# EAGLE board ir_hid (EAGLE 6.5.0)
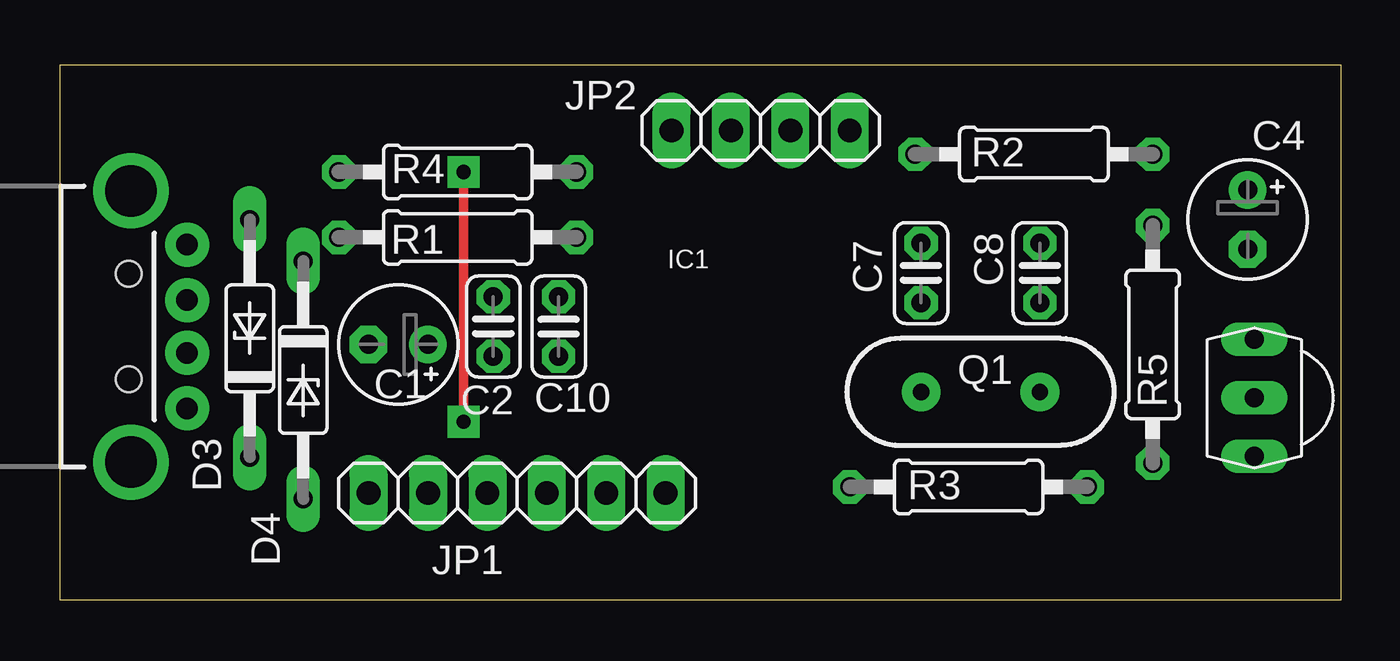
[diagram p0: board, top side]
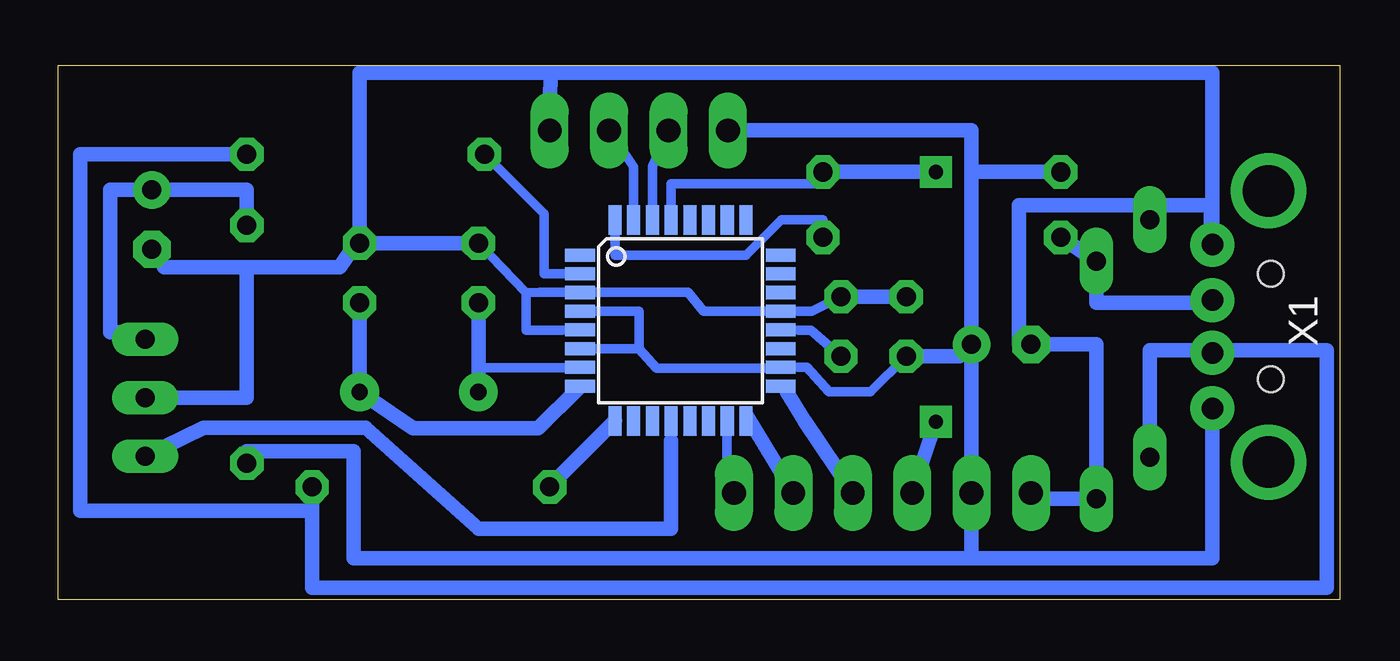
[diagram p1: board, bottom side, seen from below]

Size 54.79 x 22.85 mm. Coordinates in mm from the lower left corner, seen from the top.
Outline: 0,0 54.79,0 54.79,22.85 0,22.85 0,0
Copper layers (1*16): Top 0.035mm / dielectric 1.5mm / Bottom 0.035mm
Design rules "default *": minimum track width 10mil, minimum drill 24mil, track to track 8mil, track to pad 8mil, pad to pad 8mil, via to via 8mil, smd to smd 8mil, copper to edge 40mil, drill to drill 8mil, minimum pad ring 12mil, minimum via ring 15mil, stop-mask expansion 4mil, vias tented up to drill 0mil, thermal gap 10mil

## Footprints (pad centres in the part's own frame; a part is rotated, then mirrored left to right if it is on the bottom)
E2,5-5 = drill 0.813 pad 1.6: + -1.27,0 | drill 0.813 pad 1.6 octagon: - 1.27,0
C025-024X044 = drill 0.813 octagon: 1 -1.27,0; 2 1.27,0
DO35Z10 = drill 0.813 long: A 5.08,0; C -5.08,0
TQFP32-08 = smd 1.27 x 0.559: 1 -4.293,2.8; 2 -4.293,2; 3 -4.293,1.2; 4 -4.293,0.4; 5 -4.293,-0.4; 6 -4.293,-1.2; 7 -4.293,-2; 8 -4.293,-2.8; 17 4.293,-2.8; 18 4.293,-2; 19 4.293,-1.2; 20 4.293,-0.4; 21 4.293,0.4; 22 4.293,1.2; 23 4.293,2; 24 4.293,2.8 | smd 0.559 x 1.27: 9 -2.8,-4.293; 10 -2,-4.293; 11 -1.2,-4.293; 12 -0.4,-4.293; 13 0.4,-4.293; 14 1.2,-4.293; 15 2,-4.293; 16 2.8,-4.293; 25 2.8,4.293; 26 2,4.293; 27 1.2,4.293; 28 0.4,4.293; 29 -0.4,4.293; 30 -1.2,4.293; 31 -2,4.293; 32 -2.8,4.293
1X06 = drill 1.016 long: 1 -6.35,0; 2 -3.81,0; 3 -1.27,0; 4 1.27,0; 5 3.81,0; 6 6.35,0
1X04 = drill 1.016 long: 1 -3.81,0; 2 -1.27,0; 3 1.27,0; 4 3.81,0
HC49US = drill 0.7 pad 1.651: 1 -2.54,0; 2 2.54,0
0207/10 = drill 0.813 octagon: 1 -5.08,0; 2 5.08,0
TSOP18XX = drill 0.813 long: GND -0.001,-0.027; OUT -2.501,-0.027; VCC 2.499,-0.027
USB-A-H = drill 0.914 pad 1.88: D+ 2.4,1.127; D- 2.4,-1.127; GND 2.4,3.5; VBUS 2.4,-3.5 | drill 2.2: GND2 0,-5.8; GND3 0,5.8 | hole 1.1: -0.1,2.25; -0.1,-2.25

## Placement (x,y rotation side)
C1  4u7/16V  [E2,5-5]  14.48,10.92 180 top
C2  100nF  [C025-024X044]  18.54,11.68 90 top
C4  4u7/16V  [E2,5-5]  50.8,16.26 270 top
C7  22pF  [C025-024X044]  36.83,13.97 90 top
C8  22pF  [C025-024X044]  41.91,13.97 90 top
C10  100nF  [C025-024X044]  21.34,11.68 270 top
D3  ZPD-3V6  [DO35Z10]  8.13,11.18 90 top
D4  ZPD-3V6  [DO35Z10]  10.41,9.4 270 top
IC1  MEGA8-16AU(8AU)  [TQFP32-08]  28.19,11.94 0 bottom
JP1  ISP  [1X06]  19.56,4.57 180 top
JP2  UART  [1X04]  29.97,20.07 0 top
Q1  12MHz  [HC49US]  39.37,8.89 0 top
R1  68  [0207/10]  17.02,15.49 180 top
R2  68  [0207/10]  41.66,19.05 0 top
R3  2K2  [0207/10]  38.86,4.83 0 top
R4  10K  [0207/10]  17.02,18.29 0 top
R5  100  [0207/10]  46.74,10.92 90 top
U$1  TSOP4838  [TSOP18XX]  51.05,8.64 90 top
X1  USBA-LP  [USB-A-H]  3.05,11.68 0 top

## Library data of the parts
C1 C2 C4 C7 C8 C10 R1-R5 = resistor
D3 D4 = diode
IC1 = atmel; MPN: ATMEGA8-16AU; OC_FARNELL: 9171371; OC_NEWARK: 73M8863
JP1 JP2 = pinhead
Q1 X1 = SparkFun
U$1 = tsop-1

## Nets
5V: C1.+ C2.1 IC1.4 IC1.6 IC1.18 JP1.5 JP2.1 R4.1 R5.1 X1.VBUS
GND: C1.- C2.2 C4.- C7.2 C8.2 C10.1 D3.A D4.A IC1.3 IC1.5 IC1.21 JP1.6 JP2.4 U$1.GND X1.GND
N$1: IC1.32 R1.1
N$2: IC1.9 R3.1
N$3: IC1.2 R2.1
N$4: D4.C R1.2 X1.D+
N$5: C10.2 IC1.20
N$6: D3.C R2.2 R3.2 X1.D-
N$7: C7.1 IC1.7 Q1.1
N$8: C8.1 IC1.8 Q1.2
N$9: IC1.29 JP1.4 R4.2
N$10: C4.+ R5.2 U$1.VCC
N$11: IC1.30 JP2.2
N$12: IC1.15 JP1.1
N$13: JP1.2
N$14: JP1.3
N$15: IC1.31 JP2.3
N$16: IC1.12 U$1.OUT

## Tracks (layer width: path | path; a pad name or v marks a point on that pad's centre or on a via)
5V
  Bottom 0.406: C2.1 20.07,8.89 21.84,8.89 22.79,9.94 IC1.18 23.9,9.91 29.21,9.91 29.97,10.74 | IC1.4 29.97,12.34 29.97,10.74 | 29.97,10.74 IC1.6
  Bottom 0.61: C1.+ JP1.5 15.75,1.78 | C1.+ 16.26,10.41 C2.1 | X1.VBUS 5.45,1.78 15.75,1.78 | 15.75,1.78 42.16,1.78 42.16,6.35 46.74,6.35 R5.1 | C1.+ 15.75,18.29 | R4.1 15.75,18.29 | JP2.1 15.75,20.07 15.75,18.29
GND
  Bottom 0.406: C10.1 22.58,12.34 23.13,12.34 IC1.21 24.04,12.34 27.2,12.34 27.87,13.14 IC1.3 | IC1.3 32.49,13.21 | IC1.5 33.26,11.53 34.8,11.53 34.8,13.13 | 34.8,13.13 34.22,13.14 IC1.3 | C7.2 34.8,13.13 | C8.2 42.06,15.24 | X1.GND 5.61,15.18 5.61,16.87
  Bottom 0.61: X1.GND 5.45,22.53 33.76,22.53 | C2.2 C10.1 | C7.2 C8.2 41.91,22.53 33.76,22.53 | 42.06,15.24 42.77,14.22 46.74,14.22 | 46.74,14.22 50.27,14.22 C4.- | U$1.GND 50.57,8.64 46.74,8.64 46.74,14.22 | D3.A 8.13,16.87 | JP1.6 12.95,4.32 D4.A 10.41,10.92 C1.- 13.72,10.92 13.72,16.87 8.13,16.87 | JP2.4 33.76,22.53 | 5.61,16.87 8.13,16.87
N$1
  Bottom 0.406: IC1.32 30.99,14.73 25.4,14.73 23.88,16.26 22.1,16.26 R1.1
N$2
  Bottom 0.61: R3.1 33.78,4.86 IC1.9
N$3
  Bottom 0.406: IC1.2 32.52,13.95 34.04,13.95 34.04,16.51 R2.1
N$4
  Bottom 0.406: X1.D+ 5.84,12.7
  Bottom 0.61: 5.84,12.7 10.41,12.7 D4.C R1.2
N$5
  Bottom 0.406: IC1.20 23.16,11.53 22.61,11.53 C10.2
N$6
  Bottom 0.406: 8.13,10.67 8.13,10.56 X1.D-
  Bottom 0.61: R2.2 53.85,19.05 53.85,3.81 43.94,3.81 | R3.2 43.94,3.81 | 43.94,3.81 43.94,0.51 0.56,0.51 0.56,10.67 8.13,10.67 | 8.13,10.56 D3.C
N$7
  Bottom 0.406: IC1.7 32.52,9.93 36.83,9.93
  Bottom 0.61: C7.1 36.83,9.93 Q1.1
N$8
  Bottom 0.406: 32.54,9.04 IC1.8
  Bottom 0.61: C8.1 Q1.2 39.62,7.34 34.29,7.34 32.54,9.04
N$9  (via drill 0.6)
  Top 0.406: v17.27,18.29 v17.27,7.62
  Bottom 0.406: R4.2 22.1,17.78 28.6,17.78 28.6,16.99 IC1.29
  Bottom 0.61: R4.2 v17.27,18.29 | v17.27,7.62 JP1.4
N$10
  Bottom 0.61: R5.2 46.74,17.53 C4.+ 52.58,17.53 52.58,11.43 51.38,11.43 U$1.VCC
N$11
  Bottom 0.406: IC1.30 29.39,17.04 29.39,18.54 JP2.2
N$12
  Bottom 0.406: IC1.15 26.19,4.86
  Bottom 0.61: 26.19,4.86 JP1.1
N$13
  Bottom 0.61: 25.37,7.89 JP1.2
N$14
  Bottom 0.61: JP1.3 22.89,7.64 23.65,8.87
N$15
  Bottom 0.406: JP2.3 30.19,18.51 IC1.31
N$16
  Bottom 0.406: IC1.12 28.6,6.8
  Bottom 0.61: U$1.OUT 48.58,7.37 41.66,7.37 36.83,3.05 28.6,3.05 28.6,6.8